# EAGLE board Riaszto (EAGLE 9.7.0)

Size 202.7 x 178.98 mm. Coordinates in mm from the lower left corner, seen from the top.
Outline: 0,0 202.7,0 202.7,178.98 0,178.98 0,0
Copper layers (1*16): Top 0.035mm / dielectric 1.5mm / Bottom 0.035mm
Design rules "default": minimum track width 6mil, minimum drill 0.35mm, track to track 6mil, track to pad 6mil, pad to pad 6mil, via to via 6mil, smd to smd 6mil, copper to edge 40mil, drill to drill 6mil, minimum pad ring 10mil, minimum via ring 8mil, stop-mask expansion 4mil, vias tented up to drill 0mil, thermal gap 10mil

## Footprints (pad centres in the part's own frame; a part is rotated, then mirrored left to right if it is on the bottom)
LEDRD254W60D565H860B = drill 0.981 pad 1.581: 1 -1.27,0; 2 1.27,0
1X08 = drill 1.016 long: 1 -8.89,0; 2 -6.35,0; 3 -3.81,0; 4 -1.27,0; 5 1.27,0; 6 3.81,0; 7 6.35,0; 8 8.89,0
PIEZO = drill 1 pad 1.6: 1 -3.5,0; 2 3.5,0
28027 = drill 1.016 long: 1 -2.54,0; 2 0,0; 3 2.54,0
RESAD1016W63L850D250B = drill 0.83 pad 1.43: 1 -5.08,0; 2 5.08,0
LCD-I2C = drill 1.016 long: 1 -19.05,-5.08; 2 -19.05,-7.62; 3 -19.05,-10.16; 4 -19.05,-12.7
ARDUINO-UNO-R3-SHIELD = drill 1.016 pad 1.88: 3.3V 24.13,-2.54; 5V 24.13,0; A0 24.13,12.7; A1 24.13,15.24; A2 24.13,17.78; A3 24.13,20.32; A4 24.13,22.86; A5 24.13,25.4; AREF -24.13,-13.97; D2 -24.13,20.32; D3 -24.13,17.78; D4 -24.13,15.24; D5 -24.13,12.7; D6 -24.13,10.16; D7 -24.13,7.62; D8 -24.13,3.81; D9 -24.13,1.27; D10 -24.13,-1.27; D11 -24.13,-3.81; D12 -24.13,-6.35; D13 -24.13,-8.89; GND@0 24.13,2.54; GND@1 24.13,5.08; GND@2 -24.13,-11.43; IOREF 24.13,-7.62; NC 24.13,-10.16; RES 24.13,-5.08; RX -24.13,25.4; SCL -24.13,-19.05; SDA -24.13,-16.51; TX -24.13,22.86; VIN 24.13,7.62

## Placement (x,y rotation side)
DRIASZTO_FENY  RED  [LEDRD254W60D565H860B]  187.38,64.95 180 top
KEYPADRIASZTO_PANEL  KEYPAD-4X4  [1X08]  13.41,145.79 0 top
PIEZORIASZTO_HANG  PIEZO  [PIEZO]  161.34,56.28 0 top
PIRMOZGAS_ERZEKELO  PIR-SENSOR_28027  [28027]  75.4,172.63 0 top
R1  220  [RESAD1016W63L850D250B]  193.73,64.95 0 top
UKIJELZO  LCD-16X2-I2CSUNFOUNDER-IIC  [LCD-I2C]  85.79,36.63 0 top
UVEZERLO  ARDUINO-UNO-R3-SHIELD  [ARDUINO-UNO-R3-SHIELD]  104.5,80.89 270 top

## Library data of the parts
DRIASZTO_FENY = Tinkercad; CATEGORY: Opto-Electronic; SUB-CATEGORY: LED; VALUE: LED_RED
KEYPADRIASZTO_PANEL PIEZORIASZTO_HANG PIRMOZGAS_ERZEKELO R1 UKIJELZO UVEZERLO = Tinkercad

## Nets
DRIASZTO_FENY_A: DRIASZTO_FENY.1 R1.1
UVEZERLO_5V: PIRMOZGAS_ERZEKELO.2 UKIJELZO.2 UVEZERLO.5V
UVEZERLO_A4: UKIJELZO.3 UVEZERLO.A4
UVEZERLO_A5: UKIJELZO.4 UVEZERLO.A5
UVEZERLO_D2: PIRMOZGAS_ERZEKELO.1 UVEZERLO.D2
UVEZERLO_D4: KEYPADRIASZTO_PANEL.1 UVEZERLO.D4
UVEZERLO_D5: KEYPADRIASZTO_PANEL.2 UVEZERLO.D5
UVEZERLO_D6: KEYPADRIASZTO_PANEL.3 UVEZERLO.D6
UVEZERLO_D7: KEYPADRIASZTO_PANEL.4 UVEZERLO.D7
UVEZERLO_D8: KEYPADRIASZTO_PANEL.5 UVEZERLO.D8
UVEZERLO_D9: KEYPADRIASZTO_PANEL.6 UVEZERLO.D9
UVEZERLO_D10: KEYPADRIASZTO_PANEL.7 UVEZERLO.D10
UVEZERLO_D11: KEYPADRIASZTO_PANEL.8 UVEZERLO.D11
UVEZERLO_D12: PIEZORIASZTO_HANG.1 UVEZERLO.D12
UVEZERLO_D13: R1.2 UVEZERLO.D13
UVEZERLO_GND: DRIASZTO_FENY.2 PIEZORIASZTO_HANG.2 PIRMOZGAS_ERZEKELO.3 UKIJELZO.1 UVEZERLO.GND@0 UVEZERLO.GND@1 UVEZERLO.GND@2

## Tracks (layer width: path | path; a pad name or v marks a point on that pad's centre or on a via)
DRIASZTO_FENY_A  (1 unrouted)
UVEZERLO_5V  (2 unrouted)
UVEZERLO_A4  (1 unrouted)
UVEZERLO_A5  (1 unrouted)
UVEZERLO_D2  (1 unrouted)
UVEZERLO_D4  (1 unrouted)
UVEZERLO_D5  (1 unrouted)
UVEZERLO_D6  (1 unrouted)
UVEZERLO_D7  (1 unrouted)
UVEZERLO_D8  (1 unrouted)
UVEZERLO_D9  (1 unrouted)
UVEZERLO_D10  (1 unrouted)
UVEZERLO_D11  (1 unrouted)
UVEZERLO_D12  (1 unrouted)
UVEZERLO_D13  (1 unrouted)
UVEZERLO_GND  (6 unrouted)